# Altium PCB PI_Speed_Control.PcbDoc
Units mil, origin at the board's own origin, x right, y up, seen from the top; angles counter-clockwise.
Board outline 2450 x 3550 mil, 2 copper layers (Top Layer, Bottom Layer); 72 components, 51 nets, 242 pads, 110 vias.
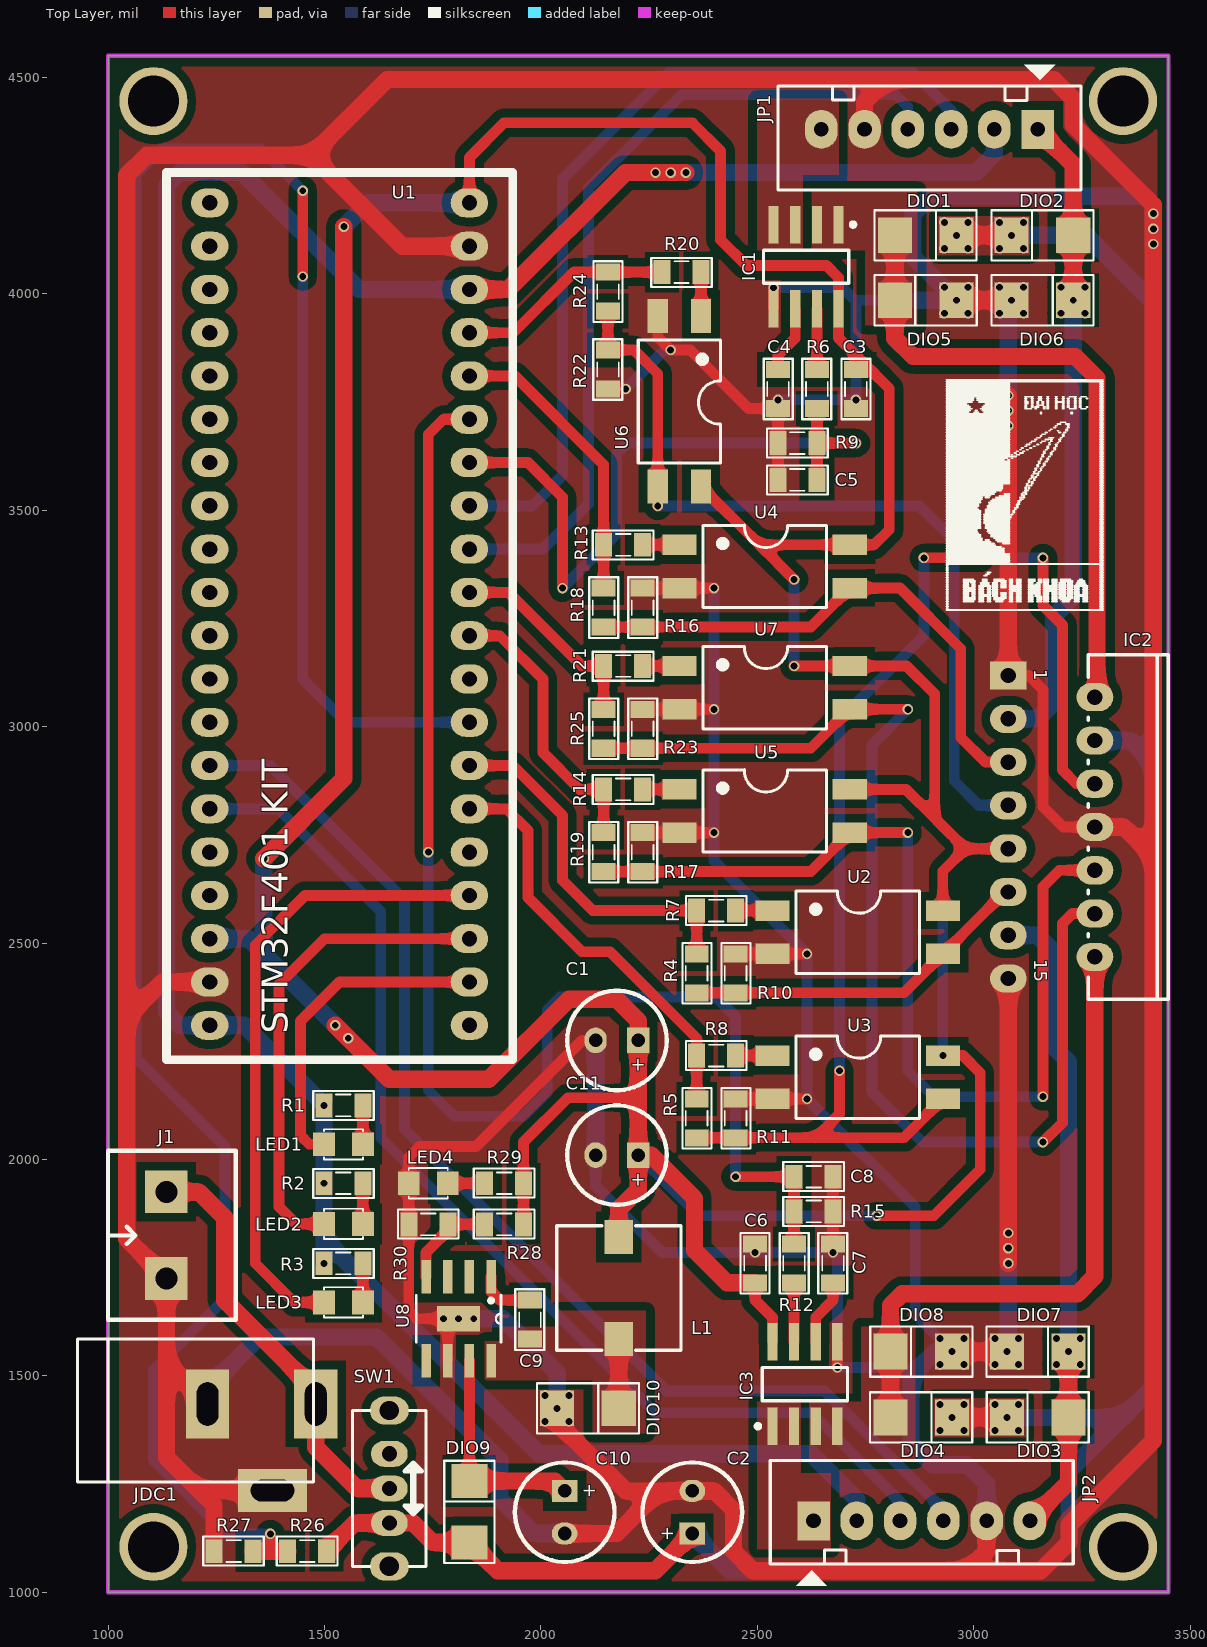
[diagram p0: Top Layer view]
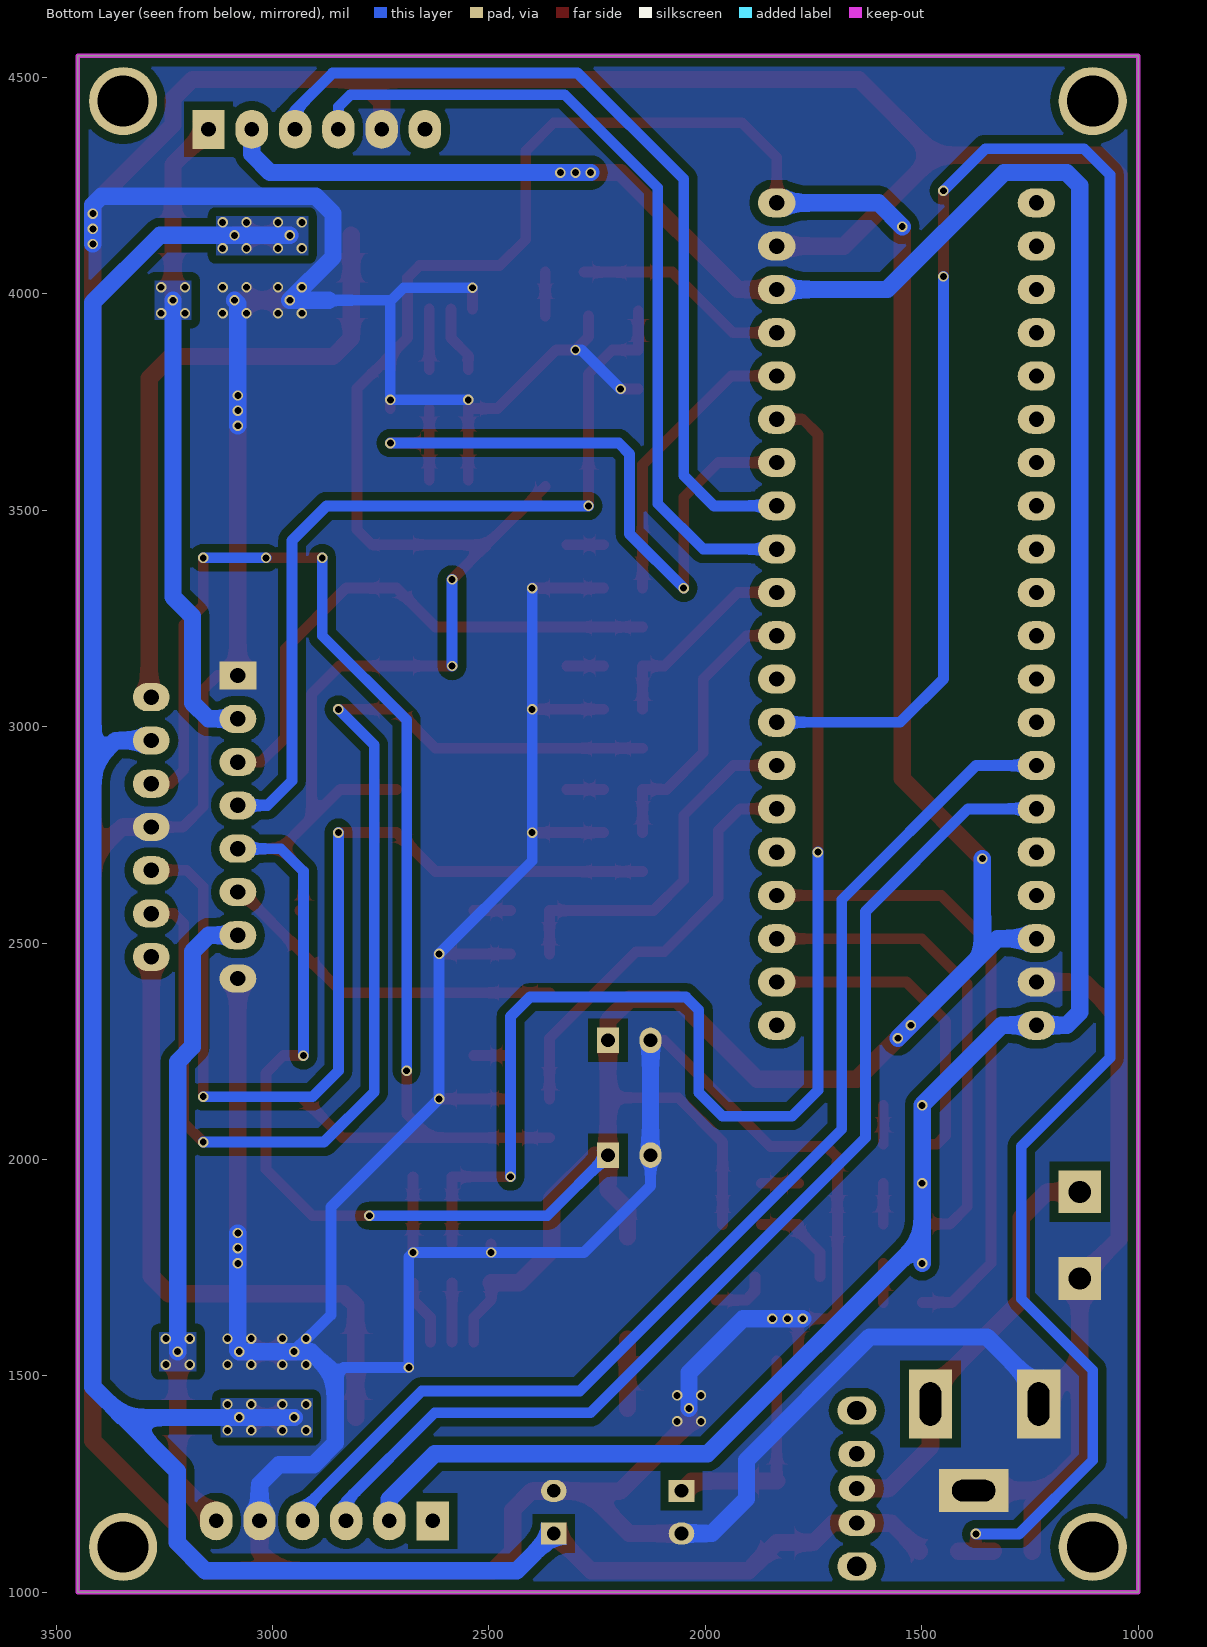
[diagram p1: Bottom Layer view, seen from below]
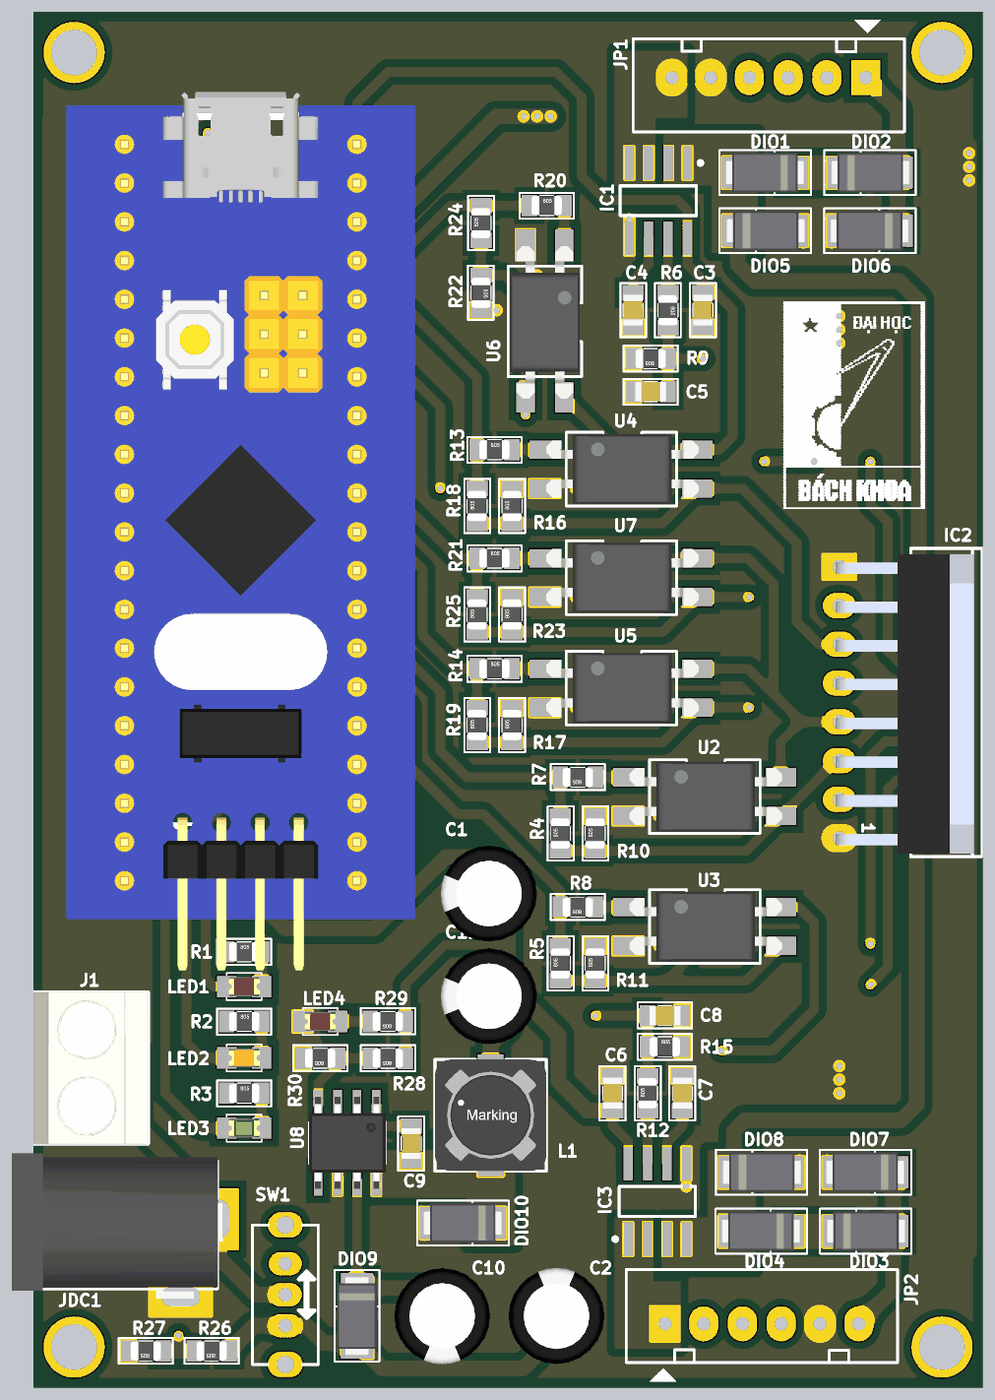
[diagram p2: 3D render of the assembled board from above, using the file's embedded part models]

## Layer stack, top to bottom
Top Solder: solder mask 0.4, Solder Resist, Dk 3.5
Top Layer: signal copper 1.4
Dielectric 1: dielectric 12.6, FR-4, Dk 4.8
Bottom Layer: signal copper 1.4
Bottom Solder: solder mask 0.4, Solder Resist, Dk 3.5

## Board outline
1000,1330 1000,4550 3450,4550 3450,1000 1000,1000

## Design rules (kind name [scope] priority, off if disabled: settings)
Clearance [All] p1: gap=20 ignorepadtopadclearanceinfootprint=TRUE except(0: Arc-Text Arc-Hole Track-Text Track-Hole SMDPad-Text SMDPad-Hole THPad-Text THPad-Hole Via-Text Via-Hole Fill-Text Fill-Hole Poly-Text Poly-Hole Region-Text Region-Hole Text-Text Text-Hole; 7: Arc-Arc Arc-Track Arc-SMDPad Track-Track Track-SMDPad SMDPad-SMDPad; 15: Arc-THPad Arc-Via Track-THPad Track-Via SMDPad-THPad SMDPad-Via THPad-THPad THPad-Via Via-Via)
PolygonConnect [All] p1: connectstyle=Direct reliefconductorwidth=10 reliefentries=4 polygonreliefangle="90 Angle" airgapwidth=10
RoutingVias [All] p1: holewidth=16 width=24 viastyle="Through Hole" minholewidth=16 minwidth=24 maxholewidth=18 maxwidth=25
SolderMaskExpansion [All] p1: expansion=4
Width [All] p1: maxlimit=40 minlimit=15 preferedwidth=25
30 further rules are at their usual default settings.

## Classes and differential pairs
component class U_POWER: C9 C10 C11 DIO9 DIO10 J1 JDC1 L1 LED4 R26 R27 R28 R29 R30 SW1 U8
component class U_MOTOR: C1 C2 C3 C4 C5 C6 C7 C8 DIO1 DIO2 DIO3 DIO4 DIO5 DIO6 DIO7 DIO8 IC1 IC2 IC3 JP1 JP2 R6 R7 R9 R12 R15 R16 R17 R18 R19 R20 R21 R22 R23 R24 R25 R26 R27 R28 R29 R30 U3 U4 U5 U6 U7 U8
component class U_MCU: LED1 LED2 LED3 R1 R2 R3 U1

## Components (designator, comment, footprint, x,y, rotation, side; value= is the part's Value field where it differs from the comment)
C1 "220uF/16V" C8mm 2175.79,2275 r180 top
C2 "220uF/25V" C8mm 2350,1185 r90 top
C3 "100nF" CAP_0805 2727.8,3780 r90 top value=33p
C4 "10nF" CAP_0805 2547.8,3780 r90 top value=33p
C5 "100nF" CAP_0805 2592.8,3570 r0 top value=33p
C6 "100nF" CAP_0805 2495,1760 r270 top value=33p
C7 "10nF" CAP_0805 2675,1760 r270 top value=33p
C8 "100nF" CAP_0805 2630,1960 r180 top value=33p
C9 "10nF" CAP_0805 1975,1630 r270 top value=33p
C10 "220uF/25V" C8mm 2055,1185 r270 top
C11 "220uF/16V" C8mm 2175.79,2010 r180 top
DIO1 "Diode SMD" DIO-214AC(SMA) 2891.8,4133 r180 top value=1N5007
DIO2 "Diode SMD" DIO-214AC(SMA) 3156,4137 r0 top value=1N5007
DIO3 "Diode SMD" DIO-214AC(SMA) 3145,1406 r0 top value=1N5007
DIO4 "Diode SMD" DIO-214AC(SMA) 2881.8,1402 r180 top value=1N5007
DIO5 "Diode SMD" DIO-214AC(SMA) 2886,3987 r0 top value=1N5007
DIO6 "Diode SMD" DIO-214AC(SMA) 3161.8,3983 r180 top value=1N5007
DIO7 "Diode SMD" DIO-214AC(SMA) 3150.8,1554 r180 top value=1N5007
DIO8 "Diode SMD" DIO-214AC(SMA) 2876,1557.99 r0 top value=1N5007
DIO9 "SS34" DIO-214AC(SMA) 1837,1189 r270 top value=1N5007
DIO10 "SS34" DIO-214AC(SMA) 2111.8,1423 r180 top value=1N5007
IC1 "ACS712" SOIC-8 2612.8,4062.56 r270 top
IC2 "L298" DIP15SL2 3180,2768 r270 top
IC3 "ACS712" SOIC-8 2610,1481 r90 top
J1 "KF2" KF2-5.08 1135,1825 r90 top
JDC1 "Jac DC" DC-IN 1355,1335 r0 top
JP1 "JP6" CON6 3147.8,4380 r180 top value="Connector 6"
JP2 "JP6" CON6 2630,1165 r0 top value="Connector 6"
L1 "22uH" L-SMD-M-7.3x4.5 2180,1703.11 r180 top value="150 mH"
LED1 "LED" LED-0805-Red 1589,2035 r180 top value="LED 3 ly Single Colour"
LED2 "LED" LED-0805-Orange 1589,1851 r180 top value="LED 3 ly Single Colour"
LED3 "LED" LED-0805-Green 1589,1669.76 r180 top value="LED 3 ly Single Colour"
LED4 "LED" LED-0805-Red 1785,1945 r180 top value="LED 3 ly Single Colour"
R1 "1k" RES-SMD-0805 1544,2125 r0 top
R2 "1k" RES-SMD-0805 1544,1945 r0 top
R3 "1k" RES-SMD-0805 1544,1760 r0 top
R4 "0R" RES-SMD-0805 2360,2430 r90 top
R5 "0R" RES-SMD-0805 2360,2095 r90 top
R6 "5k6" RES-SMD-0805 2637.8,3780 r270 top
R7 "330R" RES-SMD-0805 2405,2575 r180 top
R8 "330R" RES-SMD-0805 2405,2240 r180 top
R9 "10k" RES-SMD-0805 2592.79,3655 r180 top
R10 "10k" RES-SMD-0805 2450,2430 r90 top
R11 "10k" RES-SMD-0805 2450,2095 r90 top
R12 "5k6" RES-SMD-0805 2585,1760 r90 top
R13 "330R" RES-SMD-0805 2190,3420 r0 top
R14 "330R" RES-SMD-0805 2190,2855 r0 top
R15 "10k" RES-SMD-0805 2630,1880 r0 top
R16 "10k" RES-SMD-0805 2235,3275 r90 top
R17 "10k" RES-SMD-0805 2235,2710 r90 top
R18 "0R" RES-SMD-0805 2145,3275 r90 top
R19 "0R" RES-SMD-0805 2145,2710 r90 top
R20 "330R" RES-SMD-0805 2325,4050 r0 top
R21 "330R" RES-SMD-0805 2190,3140 r0 top
R22 "10k" RES-SMD-0805 2155,3825 r270 top
R23 "10k" RES-SMD-0805 2235,2995 r90 top
R24 "0R" RES-SMD-0805 2155,4005 r90 top
R25 "0R" RES-SMD-0805 2145,2995 r90 top
R26 "10k" RES-SMD-0805 1460,1095 r180 top
R27 "3k3" RES-SMD-0805 1290,1095 r180 top
R28 "10k" RES-SMD-0805 1915,1850 r180 top
R29 "1k" RES-SMD-0805 1915,1945 r180 top
R30 "3k3" RES-SMD-0805 1740,1850 r180 top
SW1 "SW102A" SW102 1650,1160 r90 top value="Switch 102 On Board"
U1 "STM32F401CCU6 kit" "STM32F401 KIT" 1555,3360 r0 top
U2 "PC817" OPTO_SMD 2535,2575 r0 top
U3 "PC817" OPTO_SMD 2535,2240 r0 top
U4 "PC817" OPTO_SMD 2320,3420 r0 top
U5 "PC817" OPTO_SMD 2320,2855 r0 top
U6 "PC817" OPTO_SMD 2370,3948.7 r270 top
U7 "PC817" OPTO_SMD 2320,3140 r0 top
U8 "TPS5430" ESOP-8 1810,1632 r270 top

## Footprints (in the part's own frame and the unit in brackets; to place one, negate y for a bottom-side part, rotate by r counter-clockwise, add the part's x,y. Pads: shape width x height; smd on the part's side, far side on the other; paste and mask are expansions set on the pad)
C8mm [mm]
  rect 1.3x1.5 hole 0.8: 1(-1.25,0)
  oval 1.3x1.5 hole 0.8: 2(1.25,0)
  silkscreen extent -2.92,-2.92 2.92,2.92, body extent -3.15,-3.15 3.16,3.15, height 11.51
CAP_0805 [mil]
  rect 39.37x55 smd: 1(-45,0) 2(45,0)
  silkscreen extent -70,-34 70,33, body extent -40,-25 40,25, height 24
CON6 [mil] "CON6"
  rect 75x90 hole 34: 1(0,0)
  oval 75x90 hole 34: 2(100,0) 3(200,0) 4(300,0) 5(400,0) 6(500,0)
  silkscreen extent -100,-150 600,140
DC-IN [mil] "Jac DC input"
  rect 100x160 hole 50 slot 100 at 90 deg: 1(125,100) 2(-125,100)
  rect 160x100 hole 50 slot 100 at 0 deg: 3(25,-100)
  silkscreen extent -425,-80 120,250, body extent -410,-105 134,269, height 434
DIO-214AC(SMA) [mm] "DO-214AC Diode Smallest Size"
  rect 2x2.1 smd: 1(1.88,-0.051) 2(-1.732,-0.051)
  silkscreen extent -2.92,-1.52 3.07,1.42, body extent -2.5,-1.35 2.7,1.25, height 2.4
DIP15SL2 [mil] "TO, Thru-Hole, Vertical, Heatsink Mounted; 15 Bent Staggered Leads; Pitch 1.27 mm"
  rect 65x85 hole 35.43: 1(-350,-100)
  oval 65x85 hole 35.43: 2(-300,100) 3(-250,-100) 4(-200,100) 5(-150,-100) 6(-100,100) 7(-50,-100) 8(0,100) 9(50,-100) 10(100,100) 11(150,-100) 12(200,100) 13(250,-100) 14(300,100) 15(350,-100)
  silkscreen extent -398,84 398,269, body extent -382,-110 390,247, height 895
ESOP-8 [mil]
  rect 78x22 smd: 1(-97,75) 2(-97,25) 3(-97,-25) 4(-97,-75) 5(97,-75) 6(97,-25) 7(97,25) 8(97,75)
  rect 60x100 smd: 9(0,0)
  Top Layer region: -190,-20
  silkscreen extent -54,-98 54,98, body extent -119,-99 119,99, height 63
KF2-5.08 [mm]
  rect 2.5x2.5 hole 1.3: 1(-2.54,0) 2(2.54,0)
  silkscreen extent -4.95,-4.08 4.95,3.43, body extent -5,-4.07 5,3.43, height 10
L-SMD-M-7.3x4.5 [mm] "WE-PDA SMD Shielded Power Inductor, 7345"
  rect 1.7x2 smd: 1(0,3) 2(0,-3)
  silkscreen extent -3.65,-3.65 3.65,3.65, body extent -3.65,-3.65 3.65,3.65, height 4.05
LED-0805-Green [mil]
  rect 50x55 smd: 1(0,0) 2(90,0)
  silkscreen extent 0,-35 90,35, body extent 5,-25 85,25, height 43
LED-0805-Orange [mil]
  rect 50x55 smd: 1(0,0) 2(90,0)
  silkscreen extent 0,-35 90,35, body extent 5,-25 85,25, height 43
LED-0805-Red [mil]
  rect 50x55 smd: 1(0,0) 2(90,0)
  silkscreen extent 0,-35 90,35, body extent 5,-25 85,25, height 43
OPTO_SMD [mm]
  rect 2x1.2 smd: 1(0,0) 2(0,-2.54) 3(10,-2.54) 4(10,0)
  silkscreen extent 1.4,-3.68 8.64,1.15, body extent 0.08,-3.56 10.08,1.02, height 3.95
RES-SMD-0805 [mil]
  rect 39.37x55 smd: 1(-45,0) 2(45,0)
  silkscreen extent -70,-34 70,33, body extent -39,-25 39,25, height 31
SOIC-8 [mm] "SOIC, 8-Leads, Body 5,0x4,0mm (max), Pitch 1,27mm, IPC Medium Density"
  rect 2.2x0.6 smd: 1(-2.475,1.905) 2(-2.475,0.635) 3(-2.475,-0.635) 4(-2.475,-1.905) 5(2.475,-1.905) 6(2.475,-0.635) 7(2.475,0.635) 8(2.475,1.905)
  silkscreen extent -2.6,-2.5 0.98,2.88, body extent -3.2,-2.5 3.2,2.5, height 1.75
"STM32F401 KIT" [mm]
  oval 2.2x1.7 hole 0.9: 1(-8.128,21.59) 2(-8.128,19.05) 3(-8.128,16.51) 4(-8.128,13.97) 5(-8.128,11.43) 6(-8.128,8.89) 7(-8.128,6.35) 8(-8.128,3.81) 9(-8.128,1.27) 10(-8.128,-1.27) 11(-8.128,-3.81) 12(-8.128,-6.35) 13(-8.128,-8.89) 14(-8.128,-11.43) 15(-8.128,-13.97) 16(-8.128,-16.51) 17(-8.128,-19.05) 18(-8.128,-21.59) 19(-8.128,-24.13) 20(-8.128,-26.67) 21(7.112,-26.67) 22(7.112,-24.13) 23(7.112,-21.59) 24(7.112,-19.05) 25(7.112,-16.51) 26(7.112,-13.97) 27(7.112,-11.43) 28(7.112,-8.89) 29(7.112,-6.35) 30(7.112,-3.81) 31(7.112,-1.27) 32(7.112,1.27) 33(7.112,3.81) 34(7.112,6.35) 35(7.112,8.89) 36(7.112,11.43) 37(7.112,13.97) 38(7.112,16.51) 39(7.112,19.05) 40(7.112,21.59)
  silkscreen extent -10.67,-28.7 9.65,23.37, body extent -11.94,-32.59 10.92,24.97, height 19.77
SW102 [mil] "Switch 102 On Board nho"
  oval 60x85 hole 35: 1(0,0) 2(80,0) 3(160,0)
  oval 65x90 hole 45: 4(260,0) 5(-100,0)
  silkscreen extent -100,-85 260,85

## Part data
C1 C2 C10 C11: library part "Cap Pol", "Polarized Capacitor (Axial)", LatestRevisionDate=17-Jul-2002, LatestRevisionNote="Re-released for DXP Platform.", PackageReference=POLAR0.8, Published=8-Jun-2000, Publisher="Altium Limited"
C3 C4 C5 C6 C7 C8 C9: library part CapSMD, "Capacitor", LatestRevisionDate=17-Jul-2002, LatestRevisionNote="Re-released for DXP Platform.", PackageReference=RAD-0.3, Published=8-Jun-2000, Publisher="Altium Limited"
DIO1 DIO2 DIO3 DIO4 DIO5 DIO6 DIO7 DIO8: "Default Diode", Code - JEDEC=DO-214-AB, Published=8-Jun-2000, Publisher="Altium Limited", Revision="July-2002: Re-released for DXP Platform."
DIO9 DIO10: library part "Diode SMD", "Default Diode", Code - JEDEC=DO-214-AB, Published=8-Jun-2000, Publisher="Altium Limited", Revision="July-2002: Re-released for DXP Platform."
IC2: "Dual Full-H Driver", ComponentLink1Description="Manufacturer Link", ComponentLink1URL=http://www.ti.com/, DatasheetVersion=Jun-1990, Note="The tab is elec is connected to GND pin", PackageDescription="TO, Thru-Hole, Vertical, Heatsink Mounted; 15 Bent Staggered Leads; Pitch 1.27 mm", PackageReference=KV015, Published=15-May-2002, Publisher="Altium Limited"
J1: Manufacturer="Würth Elektronik eiSos GmbH", partNo=691103110002, ComponentLink1 Description=Manufacturer, ComponentLink1URL=http://www.we-online.com, ComponentLink2 Description=Datasheet, ComponentLink2URL=http://katalog.we-online.de/em/datasheet/6911031100xx.pdf, Created by="Karrer Zheng", Created Date="29 October 2013", NoPins=2
JDC1: library part DCIN, "Jac DC input"
JP1 JP2: library part Con6, "Connector 6"
L1: library part Inductor, "Inductor"
LED1 LED2 LED3 LED4: "LED Single colour Green and Red"
R1 R2 R3 R4 R5 R6 R7 R8 R9 R10 R11 R12 R13 R14 R15 R16 R17 R18 R19 R20 R21 R22 R23 R24 R25 R26 R27 R28 R29 R30: library part "Resistor - SMD", "Resistor SMD", Manufacturer="Generic Components", Class=Passive, Published=08/06/2000, Publisher="Altium Hobart Technology Centre"
SW1: "Switch 102 on Broad"
U1: library part STM32F401CCU6, "STM32F401CCU6 breakout board. STM32 ARM-based 32-bit MCU"
U2 U3 U4 U5 U6 U7: "Single Opto"
U8: Name=TPS5430

## Free pads (board coordinates)
  round 157.48 hole 118.11: 0(1105,1105) 0(1105,4445) 0(3345,1105) 0(3345,4445)

## Via types
v1: diameter 24, hole 16, Top Layer to Bottom Layer, 110 vias

## Nets (pads, with @x,y where several pads share a name; then routed paths per layer and width w, separated by ;. In a path a pad name is that pad's centre, name@x,y a point inside that pad or via, vN(x,y) a via of type N, cw(c..) or ccw(c..) an arc to the next point about the centre after c; other vN are vias at no path point)
1A1: IC2.5 R16.1 R18.1 U4.3 | length 1258.9
  Top Layer w25: R18.1 R16.1 2623.7,3230 U4.3 2830,3320 2970,3180 2970,2975 3027,2918 IC2.5
1A2: IC2.7 R22.1 R24.1 U6.3 | length 1954.5
  Top Layer w25: R24.1 R22.1 2215,3870 2270,3815 U6.3 v1(2270,3510)
  Bottom Layer w25: v1(2270,3510) 2875,3510 2955,3430 2955,2875 3012,2818 IC2.7
1EN: IC2.6 R5.1 R11.1 U3.3 | length 2921.4
  Top Layer w25: R5.1 R11.1 2635,2050 ; v1(2690,2205) 2690,2105 2635,2050 ; v1(2885,3390) v1(3015,3390) ; U3.3 2838.7,2050 2635,2050 ; v1(3160,3390) 3160,3280 3205,3235 3205,2900 3237,2868 IC2.6
  Bottom Layer w25: v1(2690,2205) 2690,3015 2885,3210 v1(2885,3390) ; v1(3015,3390) v1(3160,3390)
2A1: IC2.10 R17.1 R19.1 U5.3 | length 2247.9
  Top Layer w25: R19.1 R17.1 2623.7,2665 U5.3 v1(2847.8,2755) ; v1(3160,2145) 3160,2630 3198,2668 IC2.10
  Bottom Layer w25: v1(2847.8,2755) 2847.8,2205 2907.8,2145 v1(3160,2145)
2A2: IC2.12 R23.1 R25.1 U7.3 | length 2709.6
  Top Layer w25: R25.1 R23.1 2623.7,2950 U7.3 v1(2847.8,3040) ; v1(3160,2040) 3205,2085 3205,2545 3228,2568 IC2.12
  Bottom Layer w25: v1(2847.8,3040) 2765,2957.2 2765,2156 2881,2040 v1(3160,2040)
2EN: IC2.11 R4.1 R10.1 U2.3 | length 816.5
  Top Layer w25: R4.1 R10.1 2838.7,2385 U2.3 3071.7,2618 IC2.11
3V3: JP1.2 JP2.2 R1.1 R2.1 R3.1 U1.20 U1.38 | length 6552.4
  Top Layer w40: U1.38 1925,4010 2195,4280 v1(2265,4280) v1(2300,4280) v1(2335,4280)
  Bottom Layer w40: v1(1499,1760) 1499,1816 ; U1.38 1580,4010 1310,4280 1165,4280 1135,4250 1135,2340 1165,2310 U1.20 1315,2310 1499,2126 v1(1499,2125) v1(1499,1945) 1499,1816 ; v1(2265,4280) v1(2300,4280) v1(2335,4280) 3005,4280 3047.8,4322.8 JP1.2 ; JP2.2 2730,1215 2625,1320 1995,1320 1499,1816
5V: C1.1 C3.2 C6.2 C11.1 IC1.8 IC2.9 IC3.8 L1.2 R28.1 R29.1 U1.18 U1.40 U2.4 U3.4 U4.4 U5.4 U6.4 U7.4 | length 10756.8
  Top Layer w25: U1.40 1835,4315 1915,4395 2350,4395 2415,4330 2415,4125 2475,4065 2660,4065 2687.8,4037.2 IC1.8 2687.8,3898.09 2727.8,3858.09 ; R28.1 R29.1 1960,2040 2062.5,2142.5 2225,2142.5 ; U6.4 2505,3420 ; C6.2 2495,1675 2535,1635 IC3.8 ; v1(2585,3140) U7.4 2845,3140 2910,3075 2910,2788.8 ; v1(2585,3340) 2505,3420 ; U5.4 2843.8,2855 2910,2788.8 ; C3.2 2727.8,3858.09 ; v1(2776,1870) 2907.8,1870 3015,1977.2 3015,2200 2975,2240 v1(2928.7,2240) ; U2.4@2937,2575 U2.4 2928.7,2665.91 2980.8,2718 ; IC2.9 2980.8,2718 ; 2505,3420 U4.4 2770,3420 2805,3455 2805,3780.89 2727.8,3858.09 ; 2910,2788.8 2920,2778.8 2980.8,2718
  Top Layer w40: v1(1360,2695) 1545,2880 v1(1545,4155) ; v1(1525,2310) v1(1555,2280) 1650,2185 1880,2185 2065,2370 2175,2370 2225,2320 C1.1 2225,2142.5 C11.1 ; L1.2 2180,1885 2225,1930 C11.1 ; C6.2 2429.99,1715.01 2355,1790 2355,1910 2255,2010 C11.1
  Bottom Layer w25: C11.1 2365,1870 v1(2776,1870) ; v1(2585,3140) v1(2585,3340) ; v1(2928.7,2240) 2928.7,2665.91 2980.8,2718 IC2.9
  Bottom Layer w40: U1.18 1325,2510 1360,2475 ; v1(1360,2695) 1360,2475 ; v1(1545,4155) 1600,4210 U1.40 ; v1(1555,2280) v1(1525,2310) 1375,2460 1360,2475
ADC_I_1: C5.2 R6.2 R9.1 U1.34 | length 1638.1
  Top Layer w25: U1.34 1970,3610 2050,3530 v1(2050,3320) ; C5.2 R9.1 ; R6.2 R9.1 ; v1(2727.8,3655) R9.1
  Bottom Layer w25: v1(2050,3320) 2175,3445 2175,3630 2200,3655 v1(2727.8,3655)
ADC_I_2: C8.2 R12.2 R15.1 U1.35 | length 3263.2
  Top Layer w25: v1(1740,2710) 1740,3675 1775,3710 U1.35 ; v1(2450,1960) C8.2 R15.1 R12.2
  Bottom Layer w25: v1(1740,2710) 1740,2160 1800,2100 1960,2100 2015,2155 2015,2345 2045,2375 2405,2375 2450,2330 v1(2450,1960)
ADC_VIN: R26.2 R27.1 U1.28 | length 5588.1
  Top Layer w25: 1375,1095 v1(1375,1135) ; v1(1450,4040) v1(1450,4238)
  Top Layer w40: R27.1 1375,1095 R26.2
  Bottom Layer w25: v1(1375,1135) 1275,1135 1105,1305 1105,1513 1270,1678 1270,2030 1065,2235 1065,4275 1125,4335 1353,4335 v1(1450,4238) ; v1(1450,4040) 1450,3110 1550,3010 U1.28
ENCODER_A1: JP1.4 U1.32 | length 1939.1
  Bottom Layer w25: U1.32 2005,3410 2110,3515 2110,4245 2325,4460 2820,4460 2847.8,4432.2 JP1.4
ENCODER_A2: JP2.4 U1.14 | length 2742.9
  Bottom Layer w25: U1.14 1375,2910 1685,2600 1685,2070 2290,1465 2655,1465 2930,1190 JP2.4
ENCODER_B1: JP1.3 U1.33 | length 2007.4
  Bottom Layer w25: U1.33 1980,3510 2050,3580 2050,4265 2295,4510 2861,4510 2947.8,4423.2 JP1.3
ENCODER_B2: JP2.3 U1.15 | length 2609.1
  Bottom Layer w25: U1.15 1393,2810 1630,2573 1630,2050 2265,1415 2625,1415 2830,1210 JP2.3
FB1: R28.2 R30.1 U8.4 | length 252.9
  Top Layer w25: U8.4 1735,1785 R30.1@1800,1850 ; R30.1 R30.1@1800,1850 ; 1820,1850 R30.1@1800,1850 ; R28.2 R30.1@1800,1850
GND: C1.2 C2.2 C3.1 C4.1 C5.1 C6.1 C7.1 C8.1 C10.2 C11.2 DIO5.1 DIO6.1 DIO7.1 DIO8.1 DIO10.1 IC1.5 IC2.1 IC2.8 IC2.15 IC3.5 J1.1 JDC1.2 JDC1.3 JP1.5 JP2.5 LED4.2 R9.2 R10.2 R11.2 R15.2 R16.2 R17.2 R22.2 R23.2 R27.2 R30.2 U1.19 U1.39 U2.2 U3.2 U4.2 U5.2 U6.2 U7.2 U8.6 U8.9 | length 25224.1
  Top Layer w25: U8.6 1785,1607 v1(1810,1632) v1(1775,1632) 1713,1632 1695,1650 R30.2 LED4.2 1695,2005 1720,2030 1850,2030 2095,2275 C1.2 ; R22.2 v1(2195.79,3780) ; R17.2 U5.2 v1(2400,2755) ; R23.2 U7.2 v1(2400,3040) ; R16.2 U4.2 v1(2400,3320) ; U6.2 2270,3900 v1(2300,3870) 2345,3870 2480,3735 C4.1 ; R11.2 U3.2 v1(2615,2140) ; R10.2 U2.2 v1(2615,2475) ; v1(2495,1785) C6.1 ; IC1.5 v1(2537.8,4013.97) ; C5.1 R9.2 C4.1 ; v1(2547.8,3755) C4.1 ; v1(2675,1785) C7.1 R15.2 C8.1 ; v1(2685,1519.39) IC3.5 ; C3.1 v1(2727.8,3755) ; IC2.1 3127,3118 3160,3085 3160,2815 3207,2768 IC2.8
  Top Layer w40: JDC1.2 1135,1530 ; U1.19 1125,2410 1043.5,2328.5 ; R27.2 1245,1201.71 1211.71,1235 ; JDC1.3 1211.71,1235 ; U1.39 1680,4110 1470,4320 ; v1(2037.8,1425) 2037.8,1392.2 2195.79,1234.21 2274.21,1234.21 ; C10.2 2175.79,1135.79 2274.21,1234.21 ; JP1.5 2747.8,4442.8 2800,4495 ; v1(2950,1555.99) v1(3076.8,1556) ; v1(2960,3985) v1(3087.8,3985) ; JP2.5 3030,1095 2985,1050 ; v1(3080,1760) v1(3080,1795) v1(3080,1830) IC2.15 ; IC2.1 v1(3080,3695) v1(3080,3730) v1(3080,3765) ; IC2.8 3347,2768 3415,2700 ; 1043.5,2328.5 1043.5,4273.5 1090,4320 1470,4320 ; 1043.5,2328.5 1043.5,1816.5 J1.1 1135,1530 ; 1135,1530 1135,1311.71 1211.71,1235 ; 1470,4320 1645,4495 2800,4495 ; 2274.21,1234.21 C2.2 2400.79,1234.21 2445,1190 2445,1095 2490,1050 2985,1050 ; 2800,4495 3185,4495 3230,4450 3230,4390 3415,4205 v1(3415,4185) v1(3415,4150) v1(3415,4115) 3415,2700 ; 2985,1050 3155,1050 3220,1115 3220,1155 3415,1350 3415,2700
  Bottom Layer w25: C11.2 2126.57,1938.43 2280,1785 v1(2495,1785) v1(2675,1785) 2685,1775 v1(2685,1519.39) 2835.61,1519.39 2855,1500 ; v1(2195.79,3780) 2285.79,3870 v1(2300,3870) ; v1(2400,3320) v1(2400,3040) v1(2400,2755) 2400,2690 v1(2615,2475) v1(2615,2140) 2865,1890 2865,1640.99 v1(2950,1555.99) ; v1(2537.8,4013.97) 2696.62,4013.97 2725.59,3985 ; v1(2547.8,3755) v1(2727.8,3755) 2727.8,3982.8 2725.59,3985 ; 2870,3985 2725.59,3985
  Bottom Layer w40: JDC1.2 1230,1470 1350,1590 1620,1590 1905,1305 1905,1215.79 1985,1135.79 C10.2 ; v1(1775,1632) v1(1810,1632) v1(1845,1632) 1913,1632 2037.8,1507.2 v1(2037.8,1425) ; C11.2 C1.2 ; 2870,3985 v1(2960,3985) 2860,4085 2860,4185 2900,4225 3395,4225 3415,4205 v1(3415,4185) v1(3415,4150) v1(3415,4115) ; JP2.5 3030,1250 2985,1295 2905,1295 2855,1345 2855,1500 2911,1556 v1(2950,1555.99) v1(3076.8,1556) 3080,1559.2 v1(3080,1760) v1(3080,1795) v1(3080,1830) ; v1(3080,3695) v1(3080,3730) v1(3080,3765) 3080,3977.2 v1(3087.8,3985)
  other v1: 2010,1395 2065,1395 2010,1455 2065,1455 2922.2,1525.99 2977.2,1525.99 3049,1526 3104,1526 2922.2,1585.99 2977.2,1585.99 3049,1586 3104,1586 2932.2,3955 2987.2,3955 3060,3955 3115,3955 2932.2,4015 2987.2,4015 3060,4015 3115,4015
LED0: LED1.2 U1.22 | length 754.6
  Top Layer w25: LED1.2 1465,2035 1445,2055 1445,2320 1535,2410 U1.22
LED1: LED2.2 U1.23 | length 1118.3
  Top Layer w25: LED2.2 1434.59,1851 1395,1890.6 1395,2405 1500,2510 U1.23
LED2: LED3.2 U1.24 | length 1474
  Top Layer w25: LED3.2 1430.24,1669.76 1340,1760 1340,2495 1455,2610 U1.24
M1: IC1.3 IC1.4 JP1.6
M2: DIO2.1 DIO6.2 IC2.3 JP1.1 | length 1497.9
  Top Layer w40: JP1.1 3230,4297.8 DIO2.1 v1(3230,3985)
  Bottom Layer w40: IC2.3 3147.8,3018 3185,3055.21 3185,3255 3230,3300 v1(3230,3985)
  other v1: 3202.2,3955 3257.2,3955 3202.2,4015 3257.2,4015
M3: DIO3.1 DIO7.2 IC2.13 JP2.6 | length 1486.7
  Top Layer w40: JP2.6 3219,1254 DIO3.1 v1(3219,1556)
  Bottom Layer w40: IC2.13 3147,2518 3185,2480 3185,2260 3219,2226 v1(3219,1556)
  other v1: 3191.2,1526 3246.2,1526 3191.2,1586 3246.2,1586
M4: IC3.1 IC3.2 JP2.1
MOTOR_DIR1: R13.1 R18.2 U1.36 | length 679.9
  Top Layer w25: U1.36 1940,3810 2145,3605 R13.1 R18.2
MOTOR_DIR2: R20.1 R24.2 U1.37 | length 503
  Top Layer w25: U1.37 1936.3,3910 2076.3,4050 R24.2 R20.1
MOTOR_DIR3: R14.1 R19.2 U1.30 | length 656.6
  Top Layer w25: U1.30 1905,3210 2005,3110 2005,2940 2090,2855 R14.1 R19.2
MOTOR_DIR4: R21.1 R25.2 U1.31 | length 480.4
  Top Layer w25: U1.31 1925,3310 2095,3140 R21.1 R25.2
NetC4_2: C4.2 IC1.6 | length 156.7
  Top Layer w25: C4.2 2547.8,3857.8 2587.8,3897.8 IC1.6
NetC7_2: C7.2 IC3.6 | length 153.1
  Top Layer w25: IC3.6 2635,1635 2675,1675 C7.2
NetC9_1: C9.1 U8.1 | length 132.3
  Top Layer w25: U8.1 1885,1695 1905,1675 C9.1
NetC9_2: C9.2 DIO10.2 L1.1 U8.8 | length 160
  Top Layer w40: DIO10.2 L1.1
NetC10_1: C10.1 DIO9.2 U8.7 | length 507.3
  Top Layer w25: DIO9.2 U8.7
  Top Layer w40: DIO9.2 2032.01,1257.2 C10.1
NetDIO1_1: DIO1.1 DIO5.2 IC1.1 IC1.2 IC2.2 | length 1482.3
  Top Layer w40: DIO1.1 DIO5.2 2817.8,3897.2 2860,3855 3235,3855 3285,3805 3285,3073 IC2.2
NetDIO4_1: DIO4.1 DIO8.2 IC2.14 IC3.3 IC3.4 | length 1496.8
  Top Layer w40: DIO4.1 DIO8.2 2807.8,1662.8 2835,1690 3240,1690 3280,1730 IC2.14
NetIC1_7: IC1.7 R6.1 | length 140.1
  Top Layer w25: R6.1 IC1.7
NetIC3_7: IC3.7 R12.1 | length 136.6
  Top Layer w25: IC3.7 R12.1
NetJ1_2: J1.2 JDC1.1 SW1.2 | length 986.2
  Top Layer w40: J1.2 1210,1925 1270,1865 1270,1674.4 1480,1464.4 JDC1.1 1480,1335 1575,1240 SW1.2
NetLED1_1: LED1.1 R1.2 | length 90
  Top Layer w25: LED1.1 R1.2
NetLED2_1: LED2.1 R2.2 | length 94
  Top Layer w25: LED2.1 R2.2
NetLED3_1: LED3.1 R3.2 | length 90.2
  Top Layer w25: LED3.1 R3.2
NetLED4_1: LED4.1 R29.2 | length 85
  Top Layer w25: LED4.1 R29.2
NetR7_1: R7.1 U2.1 | length 85
  Top Layer w25: R7.1 U2.1
NetR8_1: R8.1 U3.1 | length 85
  Top Layer w25: R8.1 U3.1
NetR13_2: R13.2 U4.1 | length 85
  Top Layer w25: R13.2 U4.1
NetR14_2: R14.2 U5.1 | length 85
  Top Layer w25: R14.2 U5.1
NetR20_2: R20.2 U6.1 | length 101.3
  Top Layer w25: U6.1 R20.2
NetR21_2: R21.2 U7.1 | length 85
  Top Layer w25: R21.2 U7.1
PWM1: R5.2 R8.2 U1.26 | length 975.3
  Top Layer w25: U1.26 1920,2810 1970,2760 1970,2605 2095,2480 2160,2480 2360,2280 R8.2 R5.2
PWM2: R4.2 R7.2 U1.27 | length 851.6
  Top Layer w25: U1.27 1935,2910 2050,2795 2050,2645 2120,2575 R7.2 R4.2
VIN: C2.1 DIO1.2 DIO2.2 DIO3.2 DIO4.2 DIO9.1 IC2.4 R26.1 SW1.1 | length 6156
  Top Layer w40: R26.1 1570,1160 SW1.1 1704.99,1160 1749.99,1115 DIO9.1 1900,1050 2264.21,1050 C2.1 ; v1(2950,1404) v1(3076.8,1404) ; v1(2960,4135) v1(3087.8,4135)
  Bottom Layer w40: C2.1 2435.79,1050 3155,1050 3220,1115 3220,1280 3344,1404 ; v1(2950,1404) v1(3076.8,1404) 3344,1404 ; v1(2960,4135) 3260,4135 3415,3980 3415,2915 ; IC2.4 3362,2968 3415,2915 ; 3344,1404 3415,1475 3415,2915
  other v1: 2922.2,1374 2977.2,1374 3049,1374 3104,1374 2922.2,1434 2977.2,1434 3049,1434 3104,1434 2932.2,4105 2987.2,4105 3060,4105 3115,4105 2932.2,4165 2987.2,4165 3060,4165 3115,4165
pads on no net: SW1.3 SW1.4 SW1.5 U1.1 U1.2 U1.3 U1.4 U1.5 U1.6 U1.7 U1.8 U1.9 U1.10 U1.11 U1.12 U1.13 U1.16 U1.17 U1.21 U1.25 U1.29 U8.2 U8.3 U8.5

## Polygon pours and split planes (outlines as drawn)
GND on Top Layer "GND_L01_P032" (solid, remove dead copper, pour order 32): 1000,1000 3450,1000 3450,4550 1000,4550
VIN on Top Layer "VIN_L01_P026" (solid, remove dead copper, pour order 26): 2917.2,4179.49 3130,4179.49 3130,4089.49 2917.2,4089.49
GND on Top Layer "GND_L01_P024" (solid, remove dead copper, pour order 24): 2917.2,4029.49 3130,4029.49 3130,3939.49 2917.2,3939.49
GND on Top Layer "GND_L01_P022" (solid, remove dead copper, pour order 22): 2907.2,1600.49 3120,1600.49 3120,1510.49 2907.2,1510.49
VIN on Top Layer "VIN_L01_P020" (solid, remove dead copper, pour order 20): 2907.2,1448.49 3120,1448.49 3120,1358.49 2907.2,1358.49
NetDIO4_1 on Top Layer "NETDIO4_1_L01_P008" (solid, remove dead copper, pour order 8): 2620,1440 2620,1305 2865,1305 2865,1613.99 2740,1613.99 2740,1440
NetDIO1_1 on Top Layer "NETDIO1_1_L01_P006" (solid, remove dead copper, pour order 6): 2625,4100.94 2625,4240 2870,4240 2870,3927 2750,3927 2750,4100.94
M1 on Top Layer "M1_L01_P004" (solid, remove dead copper, pour order 4): 2500,4100 2500.94,4100.94 2605,4100.94 2605,4275 2687.8,4275 2687.8,4450 2500,4450
M4 on Top Layer "M4_L01_P002" (solid, remove dead copper, pour order 2): 2500,1440 2600,1440 2600,1275 2670,1275 2670,1100 2500,1100
NetC9_2 on Top Layer "NETC9_2_L01_P000" (solid, remove dead copper, pour order 0): 1870,1490 1870,1580 1908,1580 1908,1613 2036.3,1613 2036.3,1650 2242.79,1650 2242.79,1367 2120,1367 2120,1490
GND on Bottom Layer "GND_L02_P034" (solid, remove dead copper, pour order 34): 1000,1000 3450,1000 3450,4550 1000,4550
M3 on Bottom Layer "M3_L02_P030" (solid, remove dead copper, pour order 30): 3176.2,1601 3261.2,1601 3261.2,1511 3176.2,1511
M2 on Bottom Layer "M2_L02_P028" (solid, remove dead copper, pour order 28): 3187.2,4030 3272.2,4030 3272.2,3940 3187.2,3940
GND on Bottom Layer "GND_L02_P018" (solid, remove dead copper, pour order 18): 2917.2,4029.49 3130,4029.49 3130,3939.49 2917.2,3939.49
GND on Bottom Layer "GND_L02_P016" (solid, remove dead copper, pour order 16): 2907.2,1600.49 3120,1600.49 3120,1510.49 2907.2,1510.49
VIN on Bottom Layer "VIN_L02_P014" (solid, remove dead copper, pour order 14): 2917.2,4179.49 3130,4179.49 3130,4089.49 2917.2,4089.49
VIN on Bottom Layer "VIN_L02_P012" (solid, remove dead copper, pour order 12): 2907.2,1448.49 3120,1448.49 3120,1358.49 2907.2,1358.49
GND on Bottom Layer "GND_L02_P010" (solid, remove dead copper, pour order 10): 1995,1470 2080,1470 2080,1380 1995,1380

## Keep-outs
Keep-Out Layer:
  lines w10: 1000,1000 1380,1000 2600,1000 3450,1000 3450,1195 3450,4550 1000,4550 1000,4455 1000,2025 1000,1330 1000,1000

## Silkscreen, mask and mechanical layers (free items; w line width, h text height)
Top Overlay:
  drawing of 697 lines, arcs and shapes, not listed

## Text inside footprints (layer, text, board x,y; h text height)
C1: Top Overlay "+" at 2242.79,2231 h30 r180
C2: Top Overlay "+" at 2306,1118 h30 r90
C10: Top Overlay "+" at 2099,1252 h30 r270
C11: Top Overlay "+" at 2242.79,1966 h30 r180
IC2: Top Overlay "15" at 3140,2463 h30 r270; Top Overlay "1" at 3140,3133 h30 r270
U1: Top Overlay "STM32F401 KIT" at 1415,2290 h60 r90